# EAGLE board right_angle_AVR (EAGLE 5.11)
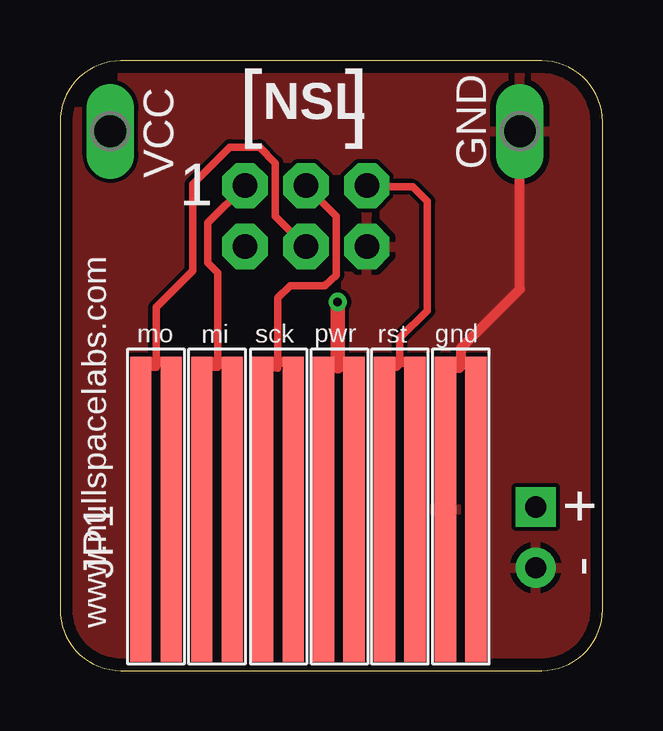
[diagram p0: board, top side]
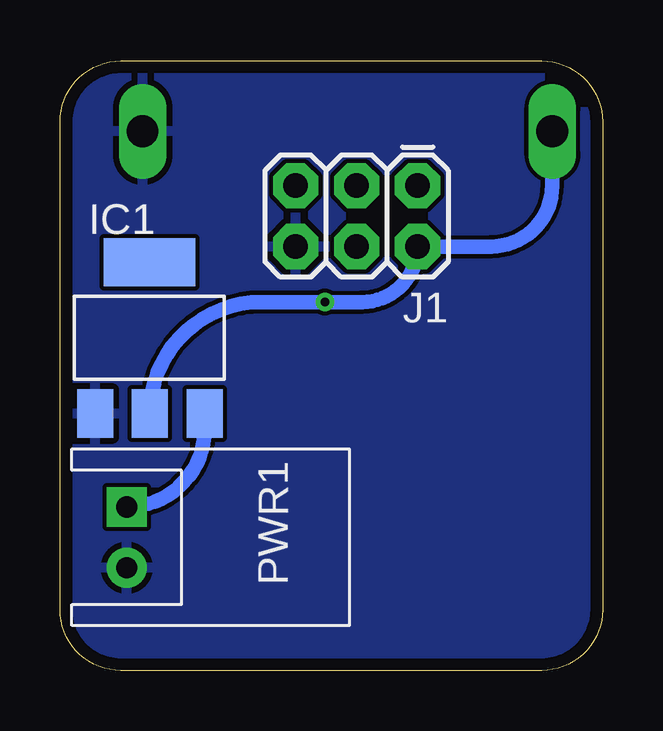
[diagram p1: board, bottom side, seen from below]

Size 22.61 x 25.4 mm. Coordinates in mm from the lower left corner, seen from the top.
Outline: 20.07,0 arc90 22.61,2.54 22.61,22.86 arc90 20.07,25.4 2.54,25.4 arc90 0,22.86 0,2.54 arc90 2.54,0 20.07,0
Copper layers (1*16): Top 0.0356mm / dielectric 1.5011mm / Bottom 0.0356mm
Design rules "SilverCircuits": minimum track width 7mil, minimum drill 14mil, track to track 7mil, track to pad 7mil, pad to pad 7mil, via to via 7mil, smd to smd 0mil, copper to edge 20mil, drill to drill 8mil, minimum pad ring 10mil, minimum via ring 8mil, stop-mask expansion 4mil, vias tented up to drill 0mil, thermal gap 10mil

## Footprints (pad centres in the part's own frame; a part is rotated, then mirrored left to right if it is on the bottom)
P1-13Y = drill 1.321 pad 1.905 long: TP 0,0
SOT223 = smd 1.499 x 2.007: 1 -2.261,-3.15; 2 0.025,-3.15; 3 2.311,-3.15 | smd 3.81 x 2.007: 4 0,3.15
2X3 = drill 1.016 pad 1.88 octagon: 1 0,0; 2 0,2.54; 3 2.54,0; 4 2.54,2.54; 5 5.08,0; 6 5.08,2.54
POGO_HORZ_X6 = smd 0.889 x 12.7: 1 -6.985,-2.54; 1@1 -5.715,-2.54; 1@2 -3.175,-2.54; 1@3 -0.635,-2.54; 1@4 1.905,-2.54; 1@5 4.445,-2.54; 1@6 6.985,-2.54; 2 -4.445,-2.54; 3 -1.905,-2.54; 4 0.635,-2.54; 5 3.175,-2.54; 6 5.715,-2.54
PWR_JST = drill 0.889 pad 1.651 square: + 2.286,-1.27 | drill 0.889 pad 1.651 round: - 2.286,1.27

## Placement (x,y rotation side)
GND  TPPAD1-13Y  [P1-13Y]  19.16,22.47 0 top
IC1  REG1117  [SOT223]  18.88,13.86 0 bottom
J1  AVR_SPI_PRG_6PTH  [2X3]  7.71,20.21 180 bottom
JP1  [POGO_HORZ_X6]  10.35,9.26 0 top
PWR1  [PWR_JST]  17.54,5.55 180 bottom
VCC  TPPAD1-13Y  [P1-13Y]  2.1,22.47 0 top

## Library data of the parts
GND VCC = testpad
IC1 = burr-brown; MPN: REG1117; OC_FARNELL: 1097566; OC_NEWARK: 14P6981
J1 = SparkFun
JP1 = right_angle_AVR
PWR1 = BBB_v1

## Nets
GND: GND.TP IC1.1 J1.6 JP1.6 PWR1.-
MISO: J1.1 JP1.2
MOSI: J1.4 JP1.1
N$1: IC1.3 PWR1.+
RST: J1.5 JP1.5
SCK: J1.3 JP1.3
VCC: IC1.2 J1.2 JP1.4 VCC.TP

## Tracks (layer width: path | path; a pad name or v marks a point on that pad's centre or on a via)
GND
  Top 0.406: JP1.6 16.07,12.66 16.12,12.61 16.65,12.61 16.73,12.69 16.73,13.45 19.16,15.89 GND.TP
  pour Top: 22.47,-0.11 0.44,-0.25 0.17,25.86 22.19,26
  pour Bottom: 22.78,-0.18 2.85,-0.38 arc-90 0.29,2.14 0.13,26.09 20.06,26.3 arc-90 22.62,23.78
MISO
  Top 0.305: J1.1 6.16,18.66 6.16,16.98 6.57,16.57 6.57,12.64 5.88,12.64 5.91,12.61 JP1.2
MOSI
  Top 0.305: J1.4 8.98,18.94 8.98,21.14 8.32,21.81 7.07,21.81 5.52,20.26 5.52,16.65 4,15.13 4,12.64 3.31,12.64 3.37,12.59 JP1.1
N$1
  Bottom 0.61: PWR1.+ arc-90 16.57,10.07 IC1.3
RST
  Top 0.305: J1.5 12.84,20.16 14.69,20.16 15.3,19.55 15.3,15 14.16,13.86 14.16,12.76 14.03,12.64 13.42,12.64 13.53,12.54 JP1.5
SCK
  Top 0.305: J1.3 11.52,18.94 11.52,16.47 11.04,16.04 9.59,16.04 9.08,15.53 9.08,12.59 9.05,12.61 8.47,12.61 8.45,12.59 JP1.3
VCC  (via drill 0.36)
  Top 0.305: 11.58,12.68 11,12.68 11,12.55 10.99,12.55 JP1.4
  Top 0.61: v11.57,15.35 arc-90 11.58,15.34 11.58,12.68
  Bottom 0.61: VCC.TP 2.1,20.21 arc90 4.64,17.67 J1.2 arc90 10.02,15.35 v11.57,15.35 14.21,15.35 arc-90 IC1.2

## Text on the board
tPlace: NSL | [ | ] | 1 | mo | mi | sck | pwr | rst | gnd | - + | www.nullspacelabs.com